# Altium PCB LCDDommonBoard.PcbDoc
Units mm, origin at the board's own origin, x right, y up, seen from the top; angles counter-clockwise.
Board outline 152.65 x 104.78 mm, 2 copper layers (Top Layer, Bottom Layer); 21 components, 48 nets, 218 pads, 42 vias.
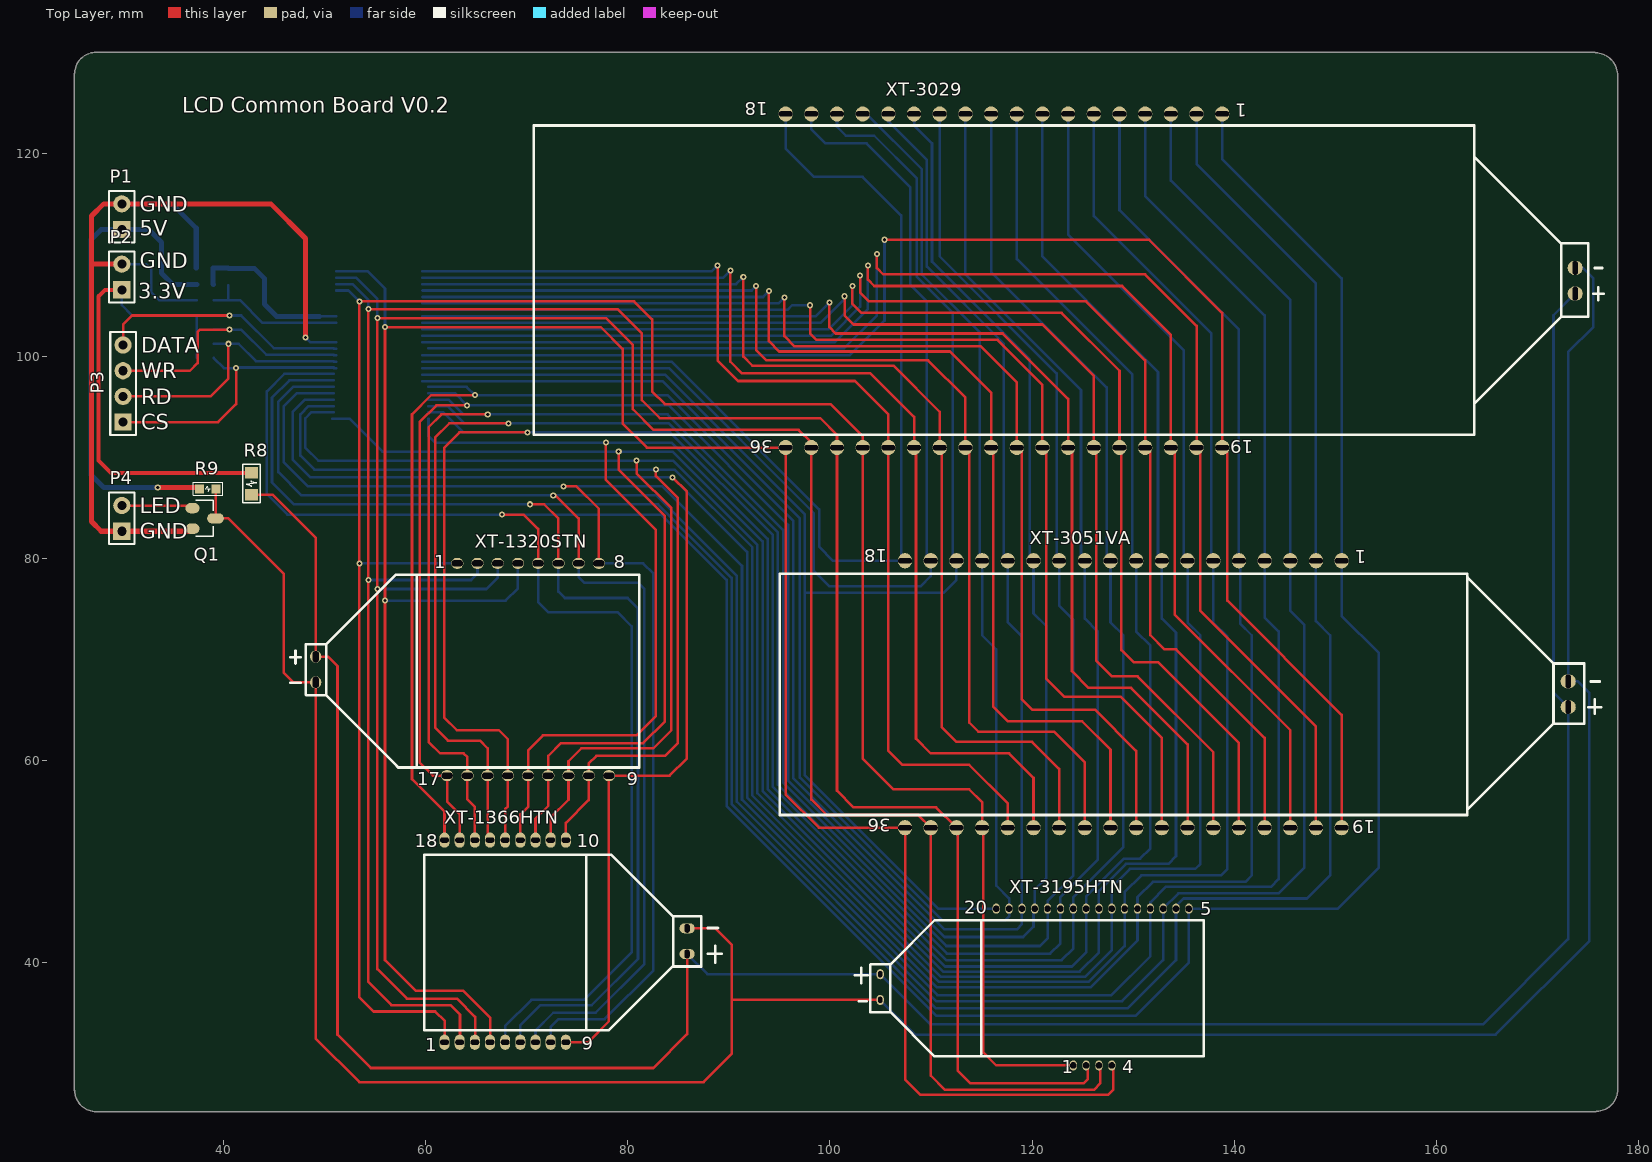
[diagram p0: Top Layer view]
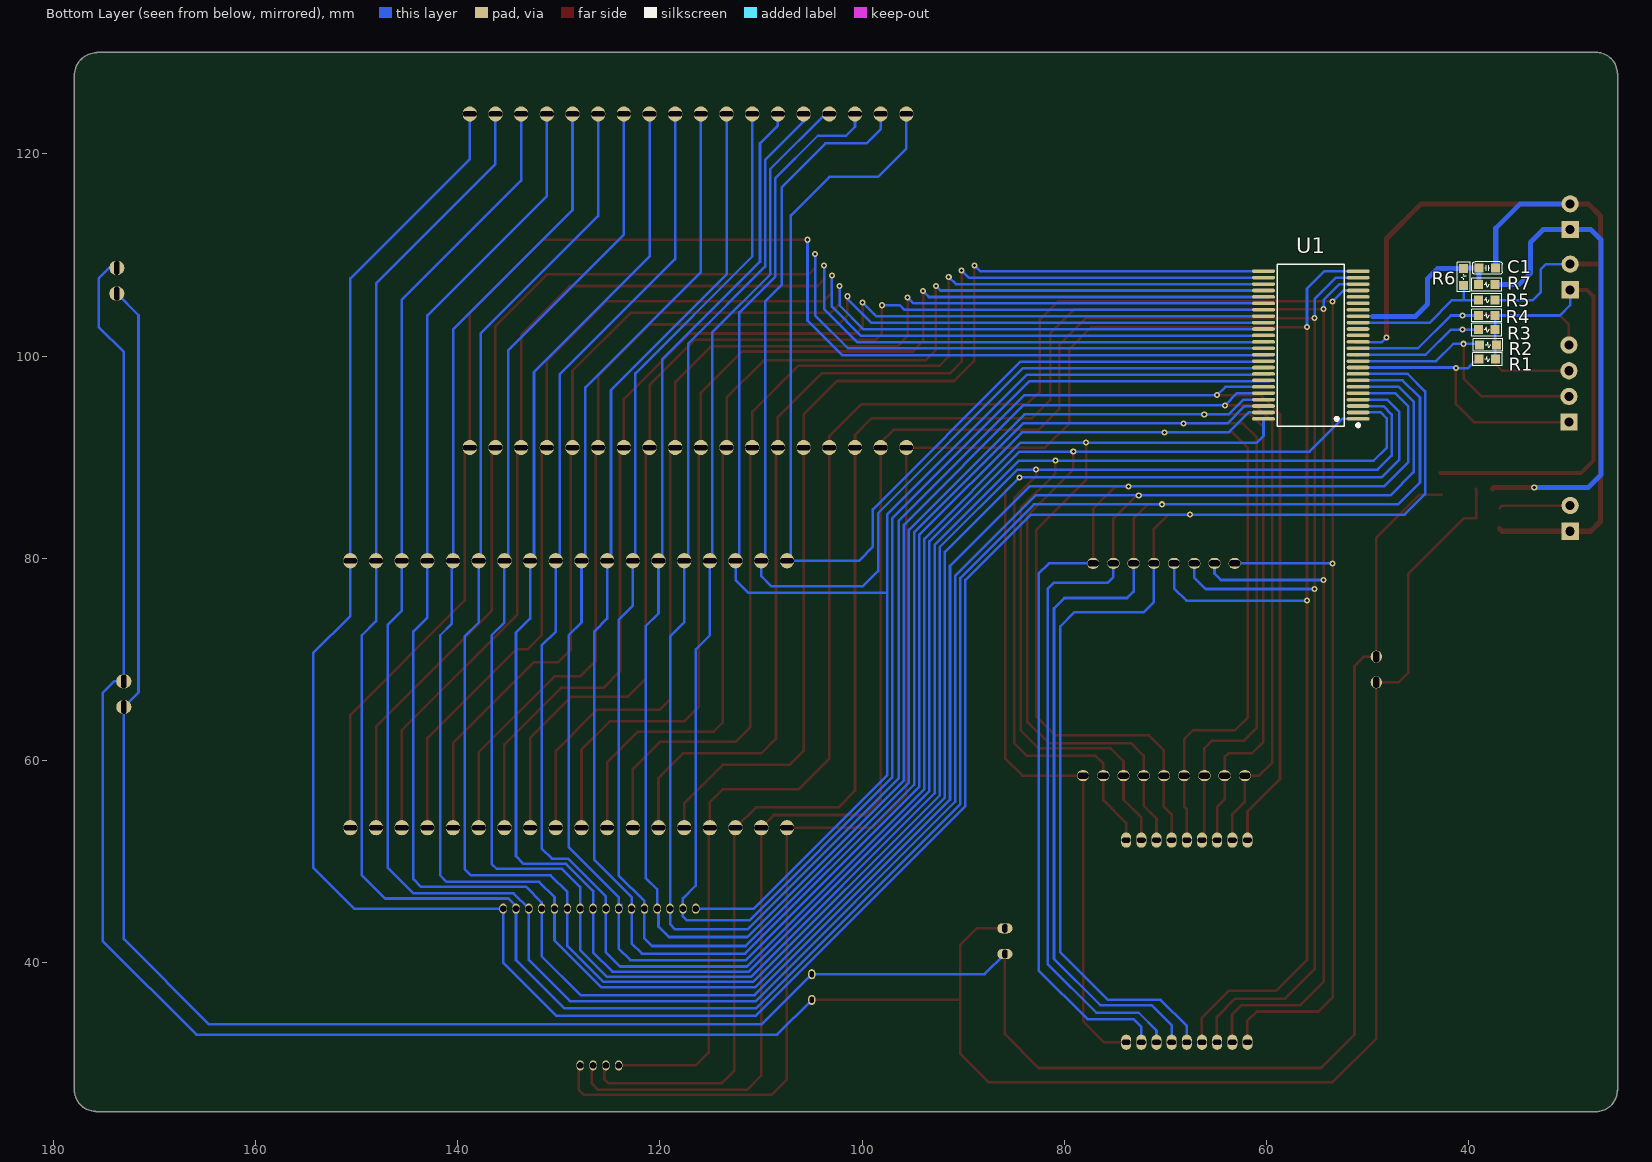
[diagram p1: Bottom Layer view, seen from below]

## Layer stack, top to bottom
Top Solder: solder mask 0.0102, Solder Resist, Dk 3.5
Top Layer: signal copper 0.0356
Dielectric1: dielectric 0.32, FR-4, Dk 4.8
Bottom Layer: signal copper 0.0356
Bottom Solder: solder mask 0.0102, Solder Resist, Dk 3.5

## Board outline
25.305,27.347 cw(c25.4,27.432) 25.273,27.432 25.273,127.922 cw(c25.4,127.922) 25.308,128.01 cw(c27.432,127.922) 27.432,130.048 175.641,130.048 cw(c175.641,129.921) 175.727,130.015 cw(c175.643,127.732) 177.927,127.732 177.927,27.432 cw(c175.8,27.432) 175.853,25.305 cw(c175.768,25.4) 175.768,25.273 27.432,25.273 cw(c27.432,27.4)

## Design rules (kind name [scope] priority, off if disabled: settings)
Clearance [All] p1: gap=0.254 ignorepadtopadclearanceinfootprint=FALSE except(0: Arc-Hole Track-Hole SMDPad-Hole THPad-Hole Via-Hole Fill-Hole Poly-Hole Region-Hole Text-Hole)
PolygonConnect [All] p1: connectstyle=Relief reliefconductorwidth=0.254 reliefentries=4 polygonreliefangle="90 Angle" airgapwidth=0.254
RoutingVias [All] p1: holewidth=0.711 width=1.27 viastyle="Through Hole" minholewidth=0.254 minwidth=0.254 maxholewidth=0.711 maxwidth=1.27
SolderMaskExpansion [All] p1: expansion=0.102
Width [All] p1: maxlimit=1 minlimit=0.254 preferedwidth=0.254 toplayer_maxwidth=0.5 minimp=50.000000 maximp=50.000000 favimp=50.000000
30 further rules are at their usual default settings.

## Components (designator, comment, footprint, x,y, rotation, side; value= is the part's Value field where it differs from the comment)
C1 "104" C0603 38.163,108.712 r180 bottom
P1 "HDR  2.54MM  1X2" HDR-1x2 29.972,113.792 r90 top
P2 "HDR  2.54MM  1X2" HDR-1x2 29.972,107.823 r90 top
P3 "HDR  2.54MM  1X4" HDR-1X4 30.099,97.282 r90 top
P4 "HDR  2.54MM  1X2" HDR-1x2 29.972,83.947 r90 top
Q1 "S8050" "SOT 23" 38.1,83.947 r270 top
R1 "10K" R0603 38.163,99.695 r0 bottom
R2 "10K" R0603 38.1,101.092 r0 bottom
R3 "10K" R0603 38.227,102.616 r0 bottom
R4 "10K" R0603 38.227,104.013 r0 bottom
R5 "8.2K" R0603 38.227,105.537 r0 bottom
R6 "2.2K" R0603 40.513,107.823 r270 bottom
R7 "47R" R0603 38.227,107.061 r0 bottom
R8 "100" R0805 42.799,87.376 r270 top
R9 "1K" R0603 38.481,86.868 r180 top
U1 "HT1621B" SSOP-48 55.626,101.092 r90 bottom locked
XT-1320STN "XT-1320STN" LCD_8+9PIN_21X22 63.152,79.502 r0 top locked (schematic designator LCD1)
XT-1366HTN "XT-1366HTN" LCD_18PIN_20X16 61.89,32.131 r0 top locked (schematic designator LCD2)
XT-3029 "XT-3029" LCD_36PIN_93X33 138.811,123.952 r180 top (schematic designator LCD3)
XT-3051VA "XT-3051VA" LCD_36PIN_68x26.4 150.622,79.756 r180 top (schematic designator LCD4)
XT-3195HTN "XT-3195HTN" LCD_4+16PIN_15.5x22 116.459,45.345 r0 top locked (schematic designator LCD5)

## Footprints (in the part's own frame and the unit in brackets; to place one, negate y for a bottom-side part, rotate by r counter-clockwise, add the part's x,y. Pads: shape width x height; smd on the part's side, far side on the other; paste and mask are expansions set on the pad)
C0603 [mil] "0603-100nF/25V    104K    贴片层叠电容"
  rect 35x35 smd: 1(-32.5,0) 2(32.5,0)
  silkscreen extent -58,-25 58,25, body extent -31,-16 31,16, height 32
HDR-1x2 [mm] "排针，2脚"
  rect 1.7x1.7 hole 0.9: 1(-1.27,0)
  round 1.7 hole 0.9: 2(1.27,0)
  silkscreen extent -2.54,-1.27 2.54,1.27, body extent -2.54,-1.27 2.54,1.27, height 8.5
HDR-1X4 [mm] "排针，4脚"
  rect 1.7x1.7 hole 0.9: 1(-3.81,0)
  round 1.7 hole 0.9: 2(-1.27,0) 3(1.27,0) 4(3.81,0)
  silkscreen extent -5.08,-1.27 5.08,1.27, body extent -5.08,-1.27 5.08,1.27, height 8.5
LCD_4+16PIN_15.5x22 [mm]
  oval 0.7x1 hole 0.6: 1(7.62,-15.5) 2(8.89,-15.5) 3(10.16,-15.5) 4(11.43,-15.5) 5(19.05,0) 6(17.78,0) 7(16.51,0) 8(15.24,0) 9(13.97,0) 10(12.7,0) 11(11.43,0) 12(10.16,0) 13(8.89,0) 14(7.62,0) 15(6.35,0) 16(5.08,0) 17(3.81,0) 18(2.54,0) 19(1.27,0) 20(0,0)
  oval 0.7x1 hole 0.6 slot 0.4 at 0 deg: 21(-11.475,-6.48) 22(-11.475,-9.02)
  silkscreen extent -13.97,-14.6 20.53,-1.14
LCD_8+9PIN_21X22 [mm]
  oval 1.2x1.1 hole 0.6 slot 1.1 at 0 deg: 1(0,0) 2(2,0) 3(4,0) 4(6,0) 5(8,0) 6(10,0) 7(12,0) 8(14,0) 9(15,-21) 10(13,-21) 11(11,-21) 12(9,-21) 13(7,-21) 14(5,-21) 15(3,-21) 16(1,-21) 17(-1,-21)
  oval 1.1x1.2 hole 0.6 slot 1.1 at 90 deg: 18(-14,-9.23) 19(-14,-11.77)
  silkscreen extent -16.51,-20.19 18,-1.14
LCD_18PIN_20X16 [mm]
  oval 1x1.5 hole 0.5 slot 0.85 at 0 deg: 1(0,0) 2(1.5,0) 3(3,0) 4(4.5,0) 5(6,0) 6(7.5,0) 7(9,0) 8(10.5,0) 9(12,0) 10(12,20) 11(10.5,20) 12(9,20) 13(7.5,20) 14(6,20) 15(4.5,20) 16(3,20) 17(1.5,20) 18(0,20)
  oval 1.5x1 hole 0.5 slot 0.85 at 90 deg: 19(24,8.73) 20(24,11.27)
  silkscreen extent -2,1.2 27.43,18.54
LCD_36PIN_68x26.4 [mm]
  oval 1.4x1.5 hole 0.5 slot 1.35 at 0 deg: 1(0,0) 2(2.54,0) 3(5.08,0) 4(7.62,0) 5(10.16,0) 6(12.7,0) 7(15.24,0) 8(17.78,0) 9(20.32,0) 10(22.86,0) 11(25.4,0) 12(27.94,0) 13(30.48,0) 14(33.02,0) 15(35.56,0) 16(38.1,0) 17(40.64,0) 18(43.18,0) 19(0,26.4) 20(2.54,26.4) 21(5.08,26.4) 22(7.62,26.4) 23(10.16,26.4) 24(12.7,26.4) 25(15.24,26.4) 26(17.78,26.4) 27(20.32,26.4) 28(22.86,26.4) 29(25.4,26.4) 30(27.94,26.4) 31(30.48,26.4) 32(33.02,26.4) 33(35.56,26.4) 34(38.1,26.4) 35(40.64,26.4) 36(43.18,26.4)
  oval 1.5x1.4 hole 0.5 slot 1.35 at 90 deg: 37(-22.41,14.47) 38(-22.41,11.93)
  silkscreen extent -25.65,1.27 55.59,25.15
LCD_36PIN_93X33 [mm]
  oval 1.4x1.5 hole 0.5 slot 1.35 at 0 deg: 1(0,0) 2(2.54,0) 3(5.08,0) 4(7.62,0) 5(10.16,0) 6(12.7,0) 7(15.24,0) 8(17.78,0) 9(20.32,0) 10(22.86,0) 11(25.4,0) 12(27.94,0) 13(30.48,0) 14(33.02,0) 15(35.56,0) 16(38.1,0) 17(40.64,0) 18(43.18,0) 19(0,33) 20(2.54,33) 21(5.08,33) 22(7.62,33) 23(10.16,33) 24(12.7,33) 25(15.24,33) 26(17.78,33) 27(20.32,33) 28(22.86,33) 29(25.4,33) 30(27.94,33) 31(30.48,33) 32(33.02,33) 33(35.56,33) 34(38.1,33) 35(40.64,33) 36(43.18,33)
  oval 1.5x1.4 hole 0.5 slot 1.35 at 90 deg: 37(-34.91,17.77) 38(-34.91,15.23)
  silkscreen extent -37.72,1.14 68.09,31.75
R0603 [mil]
  rect 35x35 smd: 1(-32.5,0) 2(32.5,0)
  silkscreen extent -58,-25 58,25, body extent -31,-15 31,16, height 16
R0805 [mil]
  rect 45x50 smd: 1(-42.5,0) 2(42.5,0)
  silkscreen extent -75,-35 75,35, body extent -39,-25 39,25, height 20
"SOT 23" [mil]
  oval 40x55 smd: 1(-40,-45) 3(40,-45)
  oval 40x65 smd: 2(0,45)
  silkscreen extent -70,-33 70,37, body extent -59,-47 59,47, height 41
SSOP-48 [mil] "L16.0-W7.6-P0.64-LS10.7-BL"
  oval 14x89.24 smd: 1(-287.5,-184.19) 2(-262.5,-184.19) 3(-237.5,-184.19) 4(-212.5,-184.19) 5(-187.5,-184.19) 6(-162.5,-184.19) 7(-137.5,-184.19) 8(-112.5,-184.19) 9(-87.5,-184.19) 10(-62.5,-184.19) 11(-37.5,-184.19) 12(-12.5,-184.19) 13(12.5,-184.19) 14(37.5,-184.19) 15(62.5,-184.19) 16(87.5,-184.19) 17(112.5,-184.19) 18(137.5,-184.19) 19(162.5,-184.19) 20(187.5,-184.19) 21(212.5,-184.19) 22(237.5,-184.19) 23(262.5,-184.19) 24(287.5,-184.19) 25(287.5,184.19) 26(262.5,184.19) 27(237.5,184.19) 28(212.5,184.19) 29(187.5,184.19) 30(162.5,184.19) 31(137.5,184.19) 32(112.5,184.19) 33(87.5,184.19) 34(62.5,184.19) 35(37.5,184.19) 36(12.5,184.19) 37(-12.5,184.19) 38(-37.5,184.19) 39(-62.5,184.19) 40(-87.5,184.19) 41(-112.5,184.19) 42(-137.5,184.19) 43(-162.5,184.19) 44(-187.5,184.19) 45(-212.5,184.19) 46(-237.5,184.19) 47(-262.5,184.19) 48(-287.5,184.19)
  silkscreen extent -318,-190 316,131

## Part data
C1: library part CAP1_60, "查不到"
Q1: library part "NPN  东芝管2SA5200", 助记码=DZG2SA, 物料代码=3.01.1, 物料名称=¶
R1 R2 R3 R4 R5 R6 R7 R8 R9: library part RES1, "1206  K  5%  HS  贴片电阻"

## Via types
v1: diameter 0.6, hole 0.3, Top Layer to Bottom Layer, 42 vias

## Nets (pads, with @x,y where several pads share a name; then routed paths per layer and width w, separated by ;. In a path a pad name is that pad's centre, name@x,y a point inside that pad or via, vN(x,y) a via of type N, cw(c..) or ccw(c..) an arc to the next point about the centre after c; other vN are vias at no path point)
+3.3V: P2.1 R1.1 R2.1 R3.1 R4.1 R8.1 | length 48
  Top Layer w0.4: P2.1 28.321,106.553 27.686,105.918 27.686,89.662 28.892,88.456 R8.1
  Bottom Layer w0.254: P2.1 29.972,105.029 30.988,104.013 R4.1 R3.1 R1.1@37.401,99.822
+5V: P1.1 R7.1 R9.2 | length 49.5
  Top Layer w0.5: v1(33.528,86.995) 37.529,86.995 R9.2
  Bottom Layer w0.5: v1(33.528,86.995) 28.194,86.995 26.924,88.265 26.924,111.506 27.94,112.522 P1.1 32.639,112.522 33.909,111.252 33.909,108.204 35.052,107.061 R7.1
ACOM0: U1.21 XT-1320STN.1 XT-1366HTN.1 XT-3029.33 XT-3051VA.33 XT-3195HTN.1 | length 231.8
  Top Layer w0.254: XT-1366HTN.1@61.921,32.385 61.921,34.218 60.96,35.179 54.864,35.179 53.467,36.576 v1(53.467,79.502) v1(53.467,105.41) 80.645,105.41 82.423,103.632 82.423,96.52 83.693,95.25 100.076,95.25 103.251,92.075 XT-3029.33 103.251,60.198 106.299,57.15 113.792,57.15 115.062,55.88 XT-3051VA.33 ; XT-3051VA.33@115.189,53.356 115.189,31.115 116.459,29.845 XT-3195HTN.1@124.227,29.845
  Bottom Layer w0.254: U1.21@51.181,106.486 52.391,106.486 v1(53.467,105.41) ; v1(53.467,79.502) XT-1320STN.1
ACOM1: U1.22 XT-1320STN.2 XT-1366HTN.2 XT-3029.34 XT-3051VA.34 XT-3195HTN.2 | length 239.1
  Top Layer w0.254: XT-1366HTN.2@63.421,32.385 63.421,34.877 62.484,35.814 56.642,35.814 54.356,38.1 v1(54.356,77.851) v1(54.356,104.648) 78.994,104.648 81.407,102.235 81.407,95.631 83.185,93.853 99.06,93.853 100.711,92.202 XT-3029.34 100.711,57.023 102.362,55.372 110.506,55.372 XT-3051VA.34 ; XT-3051VA.34@112.514,53.348 112.649,53.213 112.649,29.337 113.919,28.067 125.095,28.067 125.497,28.469 XT-3195HTN.2@125.497,29.845
  Bottom Layer w0.254: U1.22@51.181,107.126 52.767,107.126 54.356,105.537 v1(54.356,104.648) ; v1(54.356,77.851) 64.516,77.851 65.152,78.487 XT-1320STN.2
ACOM2: U1.23 XT-1320STN.3 XT-1366HTN.3 XT-3029.35 XT-3051VA.35 XT-3195HTN.3 | length 242.9
  Top Layer w0.254: XT-1366HTN.3@64.921,32.385 64.921,34.647 63.119,36.449 58.166,36.449 55.245,39.37 v1(55.245,76.962) v1(55.245,103.759) 77.851,103.759 80.518,101.092 80.518,94.742 82.55,92.71 96.901,92.71 98.171,91.44 XT-3029.35 98.171,56.134 99.695,54.61 108.728,54.61 XT-3051VA.35 109.982,28.829 111.379,27.432 126.111,27.432 126.767,28.088 XT-3195HTN.3@126.767,29.845
  Bottom Layer w0.254: U1.23@51.181,107.766 53.143,107.766 55.245,105.664 v1(55.245,103.759) ; v1(55.245,76.962) 66.04,76.962 67.152,78.074 XT-1320STN.3
ACOM3: U1.24 XT-1320STN.4 XT-1366HTN.4 XT-3029.36 XT-3051VA.36 XT-3195HTN.4 | length 248.1
  Top Layer w0.254: XT-1366HTN.4@66.421,32.385 66.421,34.544 63.754,37.211 59.055,37.211 56.007,40.259 v1(56.007,75.819) v1(56.007,102.87) 77.343,102.87 79.502,100.711 79.502,93.345 81.895,90.952 XT-3029.36 95.631,56.642 98.917,53.356 XT-3051VA.36 107.442,28.448 108.966,26.924 127.508,26.924 128.037,27.453 XT-3195HTN.4@128.037,29.845
  Bottom Layer w0.254: U1.24@51.181,108.406 54.281,108.406 56.007,106.68 v1(56.007,102.87) ; v1(56.007,75.819) 67.945,75.819 69.152,77.026 XT-1320STN.4
AG0: U1.8 XT-1320STN.5 XT-1366HTN.5 XT-3029.1 XT-3051VA.1 XT-3195HTN.5 | length 323.3
  Top Layer w0.254: v1(67.564,84.328) 69.723,84.328 71.152,82.899 XT-1320STN.5 ; XT-1366HTN.5@67.921,32.385 XT-1366HTN.5@68.072,32.536
  Bottom Layer w0.254: U1.8 46.038,98.234 44.323,96.52 44.323,86.36 46.355,84.328 v1(67.564,84.328) 83.312,84.328 89.789,77.851 89.789,55.499 110.522,34.766 130.27,34.766 135.509,40.005 XT-3195HTN.5 150.247,45.345 154.305,49.403 154.305,70.612 150.622,74.295 XT-3051VA.1 150.622,107.696 138.811,119.507 XT-3029.1 ; XT-1366HTN.5 67.89,33.727 70.485,36.322 75.692,36.322 80.391,41.021 80.391,73.279 78.994,74.676 72.136,74.676 71.152,75.66 XT-1320STN.5
AG1: U1.7 XT-1320STN.6 XT-1366HTN.6 XT-3029.2 XT-3051VA.2 XT-3195HTN.6 | length 313.8
  Top Layer w0.254: XT-1366HTN.6@69.421,32.385 XT-1366HTN.6@69.469,32.433 ; v1(70.358,85.344) 71.755,85.344 73.152,83.947 XT-1320STN.6
  Bottom Layer w0.254: U1.7 46.545,97.599 44.831,95.885 44.831,87.503 46.99,85.344 v1(70.358,85.344) 83.014,85.344 90.297,78.061 90.297,55.709 110.522,35.484 129.464,35.484 134.239,40.259 XT-3195HTN.6 134.239,45.593 135.001,46.355 147.193,46.355 149.479,48.641 149.479,72.39 148.082,73.787 XT-3051VA.2 148.082,107.188 136.271,118.999 XT-3029.2 ; XT-1366HTN.6 69.39,33.83 71.374,35.814 76.454,35.814 81.026,40.386 81.026,75.057 80.01,76.073 73.787,76.073 73.152,76.708 XT-1320STN.6
AG2: U1.6 XT-1320STN.7 XT-1366HTN.7 XT-3029.3 XT-3051VA.3 XT-3195HTN.7 | length 305.9
  Top Layer w0.254: XT-1366HTN.7@70.866,32.44 XT-1366HTN.7@70.921,32.385 ; v1(72.644,86.233) 72.866,86.233 75.152,83.947 XT-1320STN.7
  Bottom Layer w0.254: U1.6 46.926,96.965 45.466,95.504 45.466,88.519 47.752,86.233 51.181,86.233 v1(72.644,86.233) 82.844,86.233 90.805,78.272 90.805,55.92 110.522,36.202 128.912,36.202 132.969,40.259 XT-3195HTN.7 134.487,46.863 144.399,46.863 146.939,49.403 146.939,73.406 145.542,74.803 XT-3051VA.3 145.542,105.537 133.731,117.348 XT-3029.3 ; XT-1366HTN.7 70.89,33.298 72.644,35.052 76.835,35.052 81.661,39.878 81.661,76.962 81.026,77.597 75.692,77.597 75.152,78.137 XT-1320STN.7
AG3: U1.5 XT-1320STN.8 XT-1366HTN.8 XT-3029.4 XT-3051VA.4 XT-3195HTN.8 | length 302.7
  Top Layer w0.254: v1(73.66,87.122) 74.93,87.122 77.152,84.9 XT-1320STN.8
  Bottom Layer w0.254: U1.5 47.307,96.329 45.974,94.996 45.974,89.535 48.387,87.122 v1(73.66,87.122) 83.439,87.122 91.313,79.248 91.313,56.13 110.649,36.794 127.853,36.794 131.699,40.64 XT-3195HTN.8 131.699,45.974 133.223,47.498 143.637,47.498 144.399,48.26 144.399,72.771 143.002,74.168 XT-3051VA.4 143.002,104.013 131.191,115.824 XT-3029.4 ; XT-1366HTN.8 72.39,33.655 73.152,34.417 77.724,34.417 82.55,39.243 82.55,78.486 81.534,79.502 XT-1320STN.8
AG4: U1.4 XT-1320STN.9 XT-1366HTN.9 XT-3029.5 XT-3051VA.5 XT-3195HTN.9 | length 294
  Top Layer w0.254: XT-1366HTN.9 76.073,32.131 78.152,34.21 XT-1320STN.9 84.156,58.502 85.852,60.198 85.852,86.614 v1(84.455,88.011)
  Bottom Layer w0.254: U1.4 48.069,95.694 46.863,94.488 46.863,89.789 48.641,88.011 v1(84.455,88.011) 91.821,80.645 91.821,56.341 110.57,37.592 125.813,37.592 130.429,42.208 XT-3195HTN.9 130.429,46.482 131.953,48.006 141.097,48.006 141.732,48.641 141.732,72.39 140.589,73.533 140.589,79.629 XT-3051VA.5 140.462,102.616 128.651,114.427 XT-3029.5
AG5: U1.3 XT-1320STN.10 XT-1366HTN.10 XT-3029.6 XT-3051VA.6 XT-3195HTN.10 | length 269.4
  Top Layer w0.254: XT-1366HTN.10 73.89,53.824 76.152,56.086 XT-1320STN.10 76.152,59.69 76.914,60.452 83.693,60.452 84.963,61.722 84.963,85.979 82.804,88.138 v1(82.804,88.773)
  Bottom Layer w0.254: U1.3 48.45,95.059 47.625,94.234 47.625,90.17 49.022,88.773 v1(82.804,88.773) 84.656,88.773 92.329,81.1 92.329,56.551 110.78,38.1 125.603,38.1 129.159,41.656 XT-3195HTN.10 129.159,46.99 130.81,48.641 138.684,48.641 139.319,49.276 139.319,72.263 137.922,73.66 XT-3051VA.6 137.73,79.948 137.73,102.235 126.111,113.854 XT-3029.6
AG6: U1.2 XT-1320STN.11 XT-1366HTN.11 XT-3029.7 XT-3051VA.7 XT-3195HTN.11 | length 266.5
  Top Layer w0.254: XT-1366HTN.11 72.39,54.356 74.152,56.118 XT-1320STN.11 74.152,59.928 75.438,61.214 82.55,61.214 84.328,62.992 84.328,84.963 80.899,88.392 v1(80.899,89.662)
  Bottom Layer w0.254: U1.2 48.704,94.424 48.133,93.853 48.133,90.932 49.403,89.662 v1(80.899,89.662) 84.485,89.662 92.837,81.31 92.837,56.762 110.991,38.608 125.222,38.608 127.889,41.275 XT-3195HTN.11 127.889,47.498 129.667,49.276 136.144,49.276 136.652,49.784 136.652,72.39 135.382,73.66 XT-3051VA.7 135.001,80.137 135.001,100.584 123.571,112.014 XT-3029.7
AG7: U1.1 XT-1320STN.12 XT-1366HTN.12 XT-3029.8 XT-3051VA.8 XT-3195HTN.12 | length 258.1
  Top Layer w0.254: XT-1366HTN.12 70.89,54.253 72.152,55.515 XT-1320STN.12 72.152,60.452 73.422,61.722 81.534,61.722 83.693,63.881 83.693,84.201 79.121,88.773 v1(79.121,90.551)
  Bottom Layer w0.254: U1.1@50.8,93.818 52.486,93.818 55.753,90.551 v1(79.121,90.551) 84.455,90.551 93.345,81.661 93.345,56.972 111.201,39.116 124.714,39.116 126.619,41.021 XT-3195HTN.12 126.619,47.117 129.286,49.784 133.477,49.784 134.239,50.546 134.239,72.644 132.842,74.041 XT-3051VA.8 132.461,80.137 132.461,98.425 121.031,109.855 XT-3029.8
AG8: U1.48 XT-1320STN.13 XT-1366HTN.13 XT-3029.9 XT-3051VA.9 XT-3195HTN.13 | length 247.9
  Top Layer w0.254: XT-1366HTN.13 69.39,54.658 70.152,55.42 XT-1320STN.13 70.152,61.008 71.628,62.484 80.899,62.484 82.804,64.389 82.804,82.804 77.851,87.757 v1(77.851,91.44)
  Bottom Layer w0.254: U1.48 60.304,92.096 60.96,91.44 v1(77.851,91.44) 84.328,91.44 93.853,81.915 93.853,57.182 111.411,39.624 123.952,39.624 125.349,41.021 XT-3195HTN.13 125.349,46.565 129.076,50.292 130.683,50.292 131.699,51.308 131.699,71.374 130.302,72.771 XT-3051VA.9 129.921,80.137 129.921,98.171 118.491,109.601 XT-3029.9
AG9: U1.47 XT-1320STN.14 XT-1366HTN.14 XT-3029.10 XT-3051VA.10 XT-3195HTN.14 | length 244.5
  Top Layer w0.254: XT-1366HTN.14 67.89,55.19 68.152,55.452 XT-1320STN.14 68.152,62.103 67.263,62.992 63.119,62.992 61.849,64.262 61.849,90.932 63.373,92.456 v1(70.104,92.456)
  Bottom Layer w0.254: U1.47 61.785,94.424 63.754,92.456 v1(70.104,92.456) 84.201,92.456 94.361,82.296 94.361,57.393 111.495,40.259 122.936,40.259 124.079,41.402 XT-3195HTN.14 124.079,46.482 129.032,51.435 129.032,72.39 127.762,73.66 XT-3051VA.10 127.381,80.137 127.381,96.901 115.951,108.331 XT-3029.10 ; XT-3195HTN.14@123.825,45.345 XT-3195HTN.14@123.825,45.72
AG10: U1.46 XT-1320STN.15 XT-1366HTN.15 XT-3029.11 XT-3051VA.11 XT-3195HTN.15 | length 241.1
  Top Layer w0.254: XT-1366HTN.15 66.152,52.369 XT-1320STN.15 66.152,61.214 65.39,61.976 62.23,61.976 60.96,63.246 60.96,91.948 62.357,93.345 v1(68.199,93.345) v1@68.199,93.472
  Bottom Layer w0.254: U1.46 62.166,95.059 63.881,93.345 v1(68.199,93.345) 84.074,93.345 94.869,82.55 94.869,57.603 111.578,40.894 121.793,40.894 122.809,41.91 XT-3195HTN.15 122.809,46.482 126.492,50.165 126.492,72.771 125.222,74.041 XT-3051VA.11 124.841,80.137 124.841,96.647 113.411,108.077 XT-3029.11 ; XT-3195HTN.15@122.555,45.345 XT-3195HTN.15@122.555,45.593
AG11: U1.45 XT-1320STN.16 XT-1366HTN.16 XT-3029.12 XT-3051VA.12 XT-3195HTN.16 | length 237.1
  Top Layer w0.254: XT-1366HTN.16 64.89,55.413 64.152,56.151 XT-1320STN.16 64.152,60.325 63.771,60.706 61.468,60.706 60.325,61.849 60.325,92.964 61.595,94.234 v1(66.167,94.234)
  Bottom Layer w0.254: U1.45 62.293,95.694 63.754,94.234 v1(66.167,94.234) 83.947,94.234 95.377,82.804 95.377,57.814 111.535,41.656 120.777,41.656 121.539,42.418 XT-3195HTN.16 121.539,46.101 124.079,48.641 124.079,73.914 122.682,75.311 XT-3051VA.12 122.428,80.01 122.428,98.298 110.871,109.855 XT-3029.12
AG12: U1.44 XT-1320STN.17 XT-1366HTN.17 XT-3029.13 XT-3051VA.13 XT-3195HTN.17 | length 232.8
  Top Layer w0.254: XT-1366HTN.17 63.39,54.72 62.152,55.958 XT-1320STN.17 60.751,58.502 59.436,59.817 59.436,93.472 61.087,95.123 v1(64.135,95.123)
  Bottom Layer w0.254: U1.44 62.928,96.329 v1(64.135,95.123) 84.074,95.123 95.885,83.312 95.885,58.024 111.364,42.545 119.126,42.545 120.142,43.561 XT-3195HTN.17@120.142,45.345 ; XT-3029.13 108.331,122.809 110.109,121.031 110.109,109.347 119.761,99.695 119.761,80.137 XT-3051VA.13 120.142,74.549 121.412,73.279 121.412,48.387 120.269,47.244 XT-3195HTN.17
AG13: U1.43 XT-1366HTN.18 XT-3029.14 XT-3051VA.14 XT-3195HTN.18 | length 232.1
  Top Layer w0.254: XT-1366HTN.18 61.89,54.95 58.674,58.166 58.674,94.234 60.579,96.139 v1(64.897,96.139)
  Bottom Layer w0.254: U1.43 64.072,96.965 v1(64.897,96.139) 83.947,96.139 96.393,83.693 96.393,58.234 111.32,43.307 118.491,43.307 118.999,43.815 XT-3195HTN.18 118.999,72.263 117.602,73.66 XT-3051VA.14 117.221,80.137 117.221,101.219 109.601,108.839 109.601,119.38 105.791,123.19 XT-3029.14
AG14: U1.42 XT-3029.15 XT-3051VA.15 XT-3195HTN.19 | length 180.9
  Bottom Layer w0.254: U1.42@59.715,97.526 83.449,97.526 97.028,83.947 97.028,58.318 111.15,44.196 117.348,44.196 117.729,44.577 XT-3195HTN.19 117.729,46.355 116.459,47.625 116.459,70.993 115.062,72.39 XT-3051VA.15 114.808,80.01 114.808,102.362 109.093,108.077 109.093,118.491 103.632,123.952 XT-3029.15
AG15: U1.41 XT-3029.16 XT-3051VA.16 XT-3195HTN.20 | length 161.9
  Bottom Layer w0.254: U1.41@59.715,98.166 83.698,98.166 97.536,84.328 97.536,76.581 ; XT-3029.16 100.711,122.682 101.6,121.793 104.394,121.793 108.585,117.602 108.585,107.867 112.141,104.311 112.141,80.137 XT-3051VA.16 112.522,77.851 111.252,76.581 97.536,76.581 ; XT-3195HTN.20 110.719,45.345 97.536,58.528 97.536,76.581
AG16: U1.40 XT-3029.17 XT-3051VA.17 | length 116
  Bottom Layer w0.254: U1.40@59.715,98.806 84.074,98.806 98.425,84.455 98.425,78.74 99.949,77.216 108.966,77.216 109.982,78.232 XT-3051VA.17 109.601,80.137 109.601,105.41 107.95,107.061 107.95,116.713 103.632,121.031 99.568,121.031 98.171,122.428 XT-3029.17
AG17: U1.39 XT-3029.18 XT-3051VA.18 | length 110
  Bottom Layer w0.254: U1.39@59.715,99.446 84.323,99.446 98.933,84.836 98.933,81.153 100.33,79.756 XT-3051VA.18 107.061,80.137 107.061,113.919 103.251,117.729 98.425,117.729 95.631,120.523 XT-3029.18
AG18: U1.38 XT-3029.19 XT-3051VA.19 | length 147.3
  Top Layer w0.254: v1(105.41,111.506) 131.572,111.506 138.811,104.267 XT-3029.19 139.319,90.444 139.319,75.819 150.622,64.516 XT-3051VA.19
  Bottom Layer w0.254: U1.38@59.715,100.086 101.991,100.086 105.41,103.505 v1(105.41,111.506)
AG19: U1.37 XT-3029.20 XT-3051VA.20 | length 141.7
  Top Layer w0.254: v1(104.648,110.109) 104.648,108.712 105.283,108.077 131.191,108.077 136.271,102.997 XT-3029.20 136.652,90.571 136.652,74.803 148.082,63.373 XT-3051VA.20
  Bottom Layer w0.254: U1.37 101.409,100.774 104.648,104.013 v1(104.648,110.109)
AG20: U1.36 XT-3029.21 XT-3051VA.21 | length 137
  Top Layer w0.254: v1(103.759,108.966) 103.759,107.569 104.394,106.934 128.905,106.934 133.731,102.108 XT-3029.21 134.112,90.571 134.112,74.422 145.542,62.992 XT-3051VA.21
  Bottom Layer w0.254: U1.36@59.715,101.366 100.477,101.366 103.759,104.648 v1(103.759,108.966)
AG21: U1.35 XT-3029.22 XT-3051VA.22 | length 131.9
  Top Layer w0.254: v1(102.997,107.95) 102.997,106.299 103.886,105.41 125.349,105.41 131.191,99.568 XT-3029.22 131.699,90.444 131.699,72.39 133.096,70.993 134.239,70.993 143.002,62.23 XT-3051VA.22
  Bottom Layer w0.254: U1.35@59.715,102.006 100.101,102.006 102.997,104.902 v1(102.997,107.95)
AG22: U1.34 XT-3029.23 XT-3051VA.23 | length 127.8
  Top Layer w0.254: v1(102.235,106.934) 102.235,105.156 103.124,104.267 122.936,104.267 128.651,98.552 XT-3029.23 128.843,90.76 128.843,70.928 130.048,69.723 132.461,69.723 140.462,61.722 XT-3051VA.23
  Bottom Layer w0.254: U1.34@59.715,102.646 99.852,102.646 102.235,105.029 v1(102.235,106.934)
AG23: U1.33 XT-3029.24 XT-3051VA.24 | length 123.1
  Top Layer w0.254: v1(101.473,105.918) 101.473,104.013 102.362,103.124 121.031,103.124 126.111,98.044 XT-3029.24 126.365,90.698 126.365,69.85 127.889,68.326 130.429,68.326 137.922,60.833 XT-3051VA.24
  Bottom Layer w0.254: U1.33@59.715,103.286 99.095,103.286 101.473,105.664 v1(101.473,105.918)
AG24: U1.32 XT-3029.25 XT-3051VA.25 | length 119.6
  Top Layer w0.254: v1@99.995,105.237 v1(99.949,105.283) 99.949,102.87 100.584,102.235 117.094,102.235 123.571,95.758 XT-3029.25 123.952,90.571 123.952,68.834 125.603,67.183 129.794,67.183 135.382,61.595 XT-3051VA.25
  Bottom Layer w0.254: U1.32@59.715,103.926 98.592,103.926 v1(99.949,105.283)
AG25: U1.31 XT-3029.26 XT-3051VA.26 | length 118.4
  Top Layer w0.254: v1(98.044,105.029) 98.044,102.235 98.679,101.6 116.586,101.6 121.031,97.155 XT-3029.26 121.412,90.571 121.412,68.072 123.19,66.294 128.778,66.294 132.842,62.23 XT-3051VA.26
  Bottom Layer w0.254: U1.31@59.715,104.566 95.803,104.566 96.266,105.029 v1(98.044,105.029)
AG26: U1.30 XT-3029.27 XT-3051VA.27 | length 117.3
  Top Layer w0.254: v1(95.504,105.791) 95.504,101.981 96.52,100.965 114.935,100.965 118.491,97.409 XT-3029.27 118.999,90.444 118.999,66.04 120.015,65.024 126.238,65.024 130.302,60.96 XT-3051VA.27
  Bottom Layer w0.254: U1.30@59.715,105.206 94.919,105.206 v1(95.504,105.791)
AG27: U1.29 XT-3029.28 XT-3051VA.28 | length 115.8
  Top Layer w0.254: v1(93.98,106.426) 93.98,101.473 94.996,100.457 111.887,100.457 115.951,96.393 XT-3029.28 116.143,90.76 116.143,65.34 117.602,63.881 124.968,63.881 127.762,61.087 XT-3051VA.28
  Bottom Layer w0.254: U1.29@59.715,105.846 93.4,105.846 v1(93.98,106.426)
AG28: U1.28 XT-3029.29 XT-3051VA.29 | length 114
  Top Layer w0.254: v1(92.71,106.934) 92.71,100.584 93.726,99.568 109.728,99.568 113.411,95.885 XT-3029.29 113.792,90.571 113.792,63.754 114.681,62.865 122.174,62.865 125.222,59.817 XT-3051VA.29
  Bottom Layer w0.254: U1.28@59.715,106.486 92.262,106.486 v1(92.71,106.934)
AG29: U1.27 XT-3029.30 XT-3051VA.30 | length 112
  Top Layer w0.254: v1(91.44,107.823) 91.44,99.949 92.329,99.06 106.299,99.06 110.871,94.488 XT-3029.30 111.063,90.76 111.063,63.308 112.522,61.849 120.015,61.849 122.682,59.182 XT-3051VA.30
  Bottom Layer w0.254: U1.27@59.715,107.126 90.743,107.126 v1(91.44,107.823)
AG30: U1.26 XT-3029.31 XT-3051VA.31 | length 110.2
  Top Layer w0.254: v1(90.17,108.458) 90.17,99.441 91.313,98.298 104.013,98.298 108.331,93.98 XT-3029.31 108.523,90.76 108.523,62.165 109.982,60.706 117.729,60.706 120.142,58.293 XT-3051VA.31
  Bottom Layer w0.254: U1.26@59.715,107.766 89.478,107.766 v1(90.17,108.458)
AG31: U1.25 XT-3029.32 XT-3051VA.32 | length 107.6
  Top Layer w0.254: v1(88.9,108.966) 88.9,99.568 90.932,97.536 102.489,97.536 105.791,94.234 XT-3029.32 105.791,60.96 107.188,59.563 113.792,59.563 117.602,55.753 XT-3051VA.32
  Bottom Layer w0.254: U1.25@59.715,108.406 88.34,108.406 v1(88.9,108.966)
GND: C1.2 P1.2 P2.2 P4.1 Q1.3 R5.1 U1.13 | length 102.3
  Top Layer w0.5: P2.2 26.982,109.093 ; Q1.3 36.703,82.677 P4.1 27.94,82.677 26.982,83.635 26.982,109.093 ; v1(48.133,101.854) 48.133,111.633 44.704,115.062 P1.2 28.194,115.062 26.982,113.85 26.982,109.093
  Bottom Layer w0.254: P2.2 32.385,109.093 32.893,108.585 32.893,106.299 33.655,105.537 R5.1 ; v1(48.133,101.854) 48.621,101.366 U1.13@51.181,101.366
  Bottom Layer w0.5: P1.2 34.925,115.062 37.338,112.649 C1.2
GPIO_LED-: P4.2 Q1.1 | length 7.1
  Top Layer w0.254: P4.2 36.703,85.217 Q1.1
LCD_CS: P3.1 R1.2 U1.9 | length 28
  Top Layer w0.254: P3.1 39.497,93.472 41.275,95.25 v1(41.275,98.806)
  Bottom Layer w0.254: R1.2@39.052,99.822 40.069,98.806 v1(41.275,98.806) 41.338,98.87 U1.9 ; U1.9@50.948,98.806 U1.9@51.181,98.806
LCD_DATA: P3.4 R4.2 U1.12 | length 26.4
  Top Layer w0.254: P3.4 30.099,103.124 30.988,104.013 v1(40.64,104.013)
  Bottom Layer w0.254: R4.2 v1(40.64,104.013) 41.783,104.013 45.021,100.774 U1.12 ; U1.12@50.948,100.726 U1.12@51.181,100.726
LCD_RD: P3.2 R2.2 U1.10 | length 27.4
  Top Layer w0.254: P3.2 38.735,96.012 40.513,97.79 v1(40.513,101.219)
  Bottom Layer w0.254: R2.2@39.052,101.219 v1(40.513,101.219) 41.529,101.219 43.243,99.504 U1.10 ; U1.10@50.948,99.446 U1.10@51.181,99.446
LCD_WR: P3.3 R3.2 U1.11 | length 27.2
  Top Layer w0.254: P3.3 36.703,98.552 37.465,99.314 37.465,102.362 37.719,102.616 v1(40.64,102.616)
  Bottom Layer w0.254: R3.2 v1(40.64,102.616) 41.783,102.616 44.259,100.139 U1.11 ; U1.11@50.948,100.086 U1.11@51.181,100.086
LED+: R8.2 XT-1320STN.18 XT-1366HTN.19 XT-3029.37 XT-3051VA.37 XT-3195HTN.21 | length 263.1
  Top Layer w0.254: R8.2@42.672,86.296 R8.2 44.895,86.296 49.152,82.039 XT-1320STN.18 50.378,70.272 51.308,69.342 51.308,32.893 54.61,29.591 82.55,29.591 85.89,32.931 XT-1366HTN.19
  Bottom Layer w0.254: XT-1366HTN.19 87.886,38.865 XT-3195HTN.21 109.94,33.909 164.592,33.909 173.032,42.349 XT-3051VA.37 171.577,66.741 171.577,104.038 XT-3029.37
LED-: Q1.2 R9.1 XT-1320STN.19 XT-1366HTN.20 XT-3029.38 XT-3051VA.38 XT-3195HTN.22 | length 280.8
  Top Layer w0.254: R9.1 39.243,86.804 Q1.2 40.513,83.947 45.974,78.486 45.974,68.707 46.949,67.732 XT-1320STN.19 49.152,32.509 53.467,28.194 87.503,28.194 90.297,30.988 90.297,36.386 ; XT-1366HTN.20 88.679,43.401 90.297,41.783 90.297,36.386 ; XT-3195HTN.22 90.358,36.325 90.297,36.386
  Bottom Layer w0.254: XT-3195HTN.22 108.416,32.893 165.862,32.893 175.133,42.164 175.133,66.675 173.982,67.826 XT-3051VA.38 173.032,100.388 175.514,102.87 175.514,107.696 174.488,108.722 XT-3029.38
NetC1_1: C1.1 R6.1 R7.2 U1.17 | length 17.3
  Bottom Layer w0.254: R6.1@40.45,108.712 R6.1 ; 49.53,103.926 U1.17@51.181,103.926
  Bottom Layer w0.5: R7.2 38.989,107.124 C1.1 R6.1@40.45,108.712 ; R6.1 43.116,108.648 44.069,107.696 44.069,105.156 45.299,103.926 49.53,103.926
NetR5_2: R5.2 R6.2 U1.16 | length 14.5
  Bottom Layer w0.254: R5.2 40.513,105.537 ; R6.2 40.513,105.537 ; U1.16@51.181,103.286 43.907,103.286 41.656,105.537 40.513,105.537
pads on no net: U1.14 U1.15 U1.18 U1.19 U1.20

## Silkscreen, mask and mechanical layers (free items; w line width, h text height)
Top Overlay:
  text "LCD Common Board V0.2" at 35.941,124.079 h1.5
  text "GND" at 31.75,114.3 h1.5
  text "5V" at 31.75,111.887 h1.5
  text "GND" at 31.75,108.712 h1.5
  text "3.3V" at 31.623,105.664 h1.5
  text "DATA" at 31.877,100.33 h1.5
  text "WR" at 31.877,97.79 h1.5
  text "RD" at 31.877,95.25 h1.5
  text "CS" at 31.877,92.71 h1.5
  text "LED" at 31.75,84.455 h1.5
  text "GND" at 31.75,81.915 h1.5
Mechanical 1:
  lines w0.254: 25.4,27.432 25.4,127.922 ; 25.432,27.4 ccw(c27.432,27.4) 27.432,25.4 175.768,25.4 ; 25.433,127.922 cw(c27.432,127.922) 27.432,129.921 175.641,129.921 ; 175.643,129.889 cw(c175.643,127.732) 177.8,127.732 177.8,27.432 cw(c175.8,27.432) 175.8,25.432

## Text inside footprints (layer, text, board x,y; h text height)
XT-1320STN: Top Overlay "1" at 60.866,78.994 h1.3; Top Overlay "8" at 78.646,78.994 h1.3; Top Overlay "9" at 79.916,57.531 h1.3; Top Overlay "17" at 59.215,57.531 h1.3
XT-1366HTN: Top Overlay "1" at 59.985,31.242 h1.3; Top Overlay "9" at 75.479,31.369 h1.3; Top Overlay "10" at 74.971,51.435 h1.3; Top Overlay "18" at 58.969,51.435 h1.3
XT-3029: Top Overlay "1" at 141.224,124.968 h1.3 r180; Top Overlay "18" at 93.853,125.095 h1.3 r180; Top Overlay "36" at 94.361,91.694 h1.3 r180; Top Overlay "19" at 141.859,91.694 h1.3 r180
XT-3051VA: Top Overlay "1" at 153.035,80.772 h1.3 r180; Top Overlay "18" at 105.664,80.899 h1.3 r180; Top Overlay "36" at 106.045,54.229 h1.3 r180; Top Overlay "19" at 153.924,54.102 h1.3 r180
XT-3195HTN: Top Overlay "1" at 122.936,29.089 h1.3; Top Overlay "4" at 128.905,29.089 h1.3; Top Overlay "5" at 136.652,44.71 h1.3; Top Overlay "20" at 113.284,44.837 h1.3